# Altium PCB RPL_3V.PcbDoc
Units mil, origin at the board's own origin, x right, y up, seen from the top; angles counter-clockwise.
Board outline 1750.01 x 1712.1 mil, 2 copper layers (Top Layer, Bottom Layer); 10 components, 7 nets, 26 pads, 45 vias.
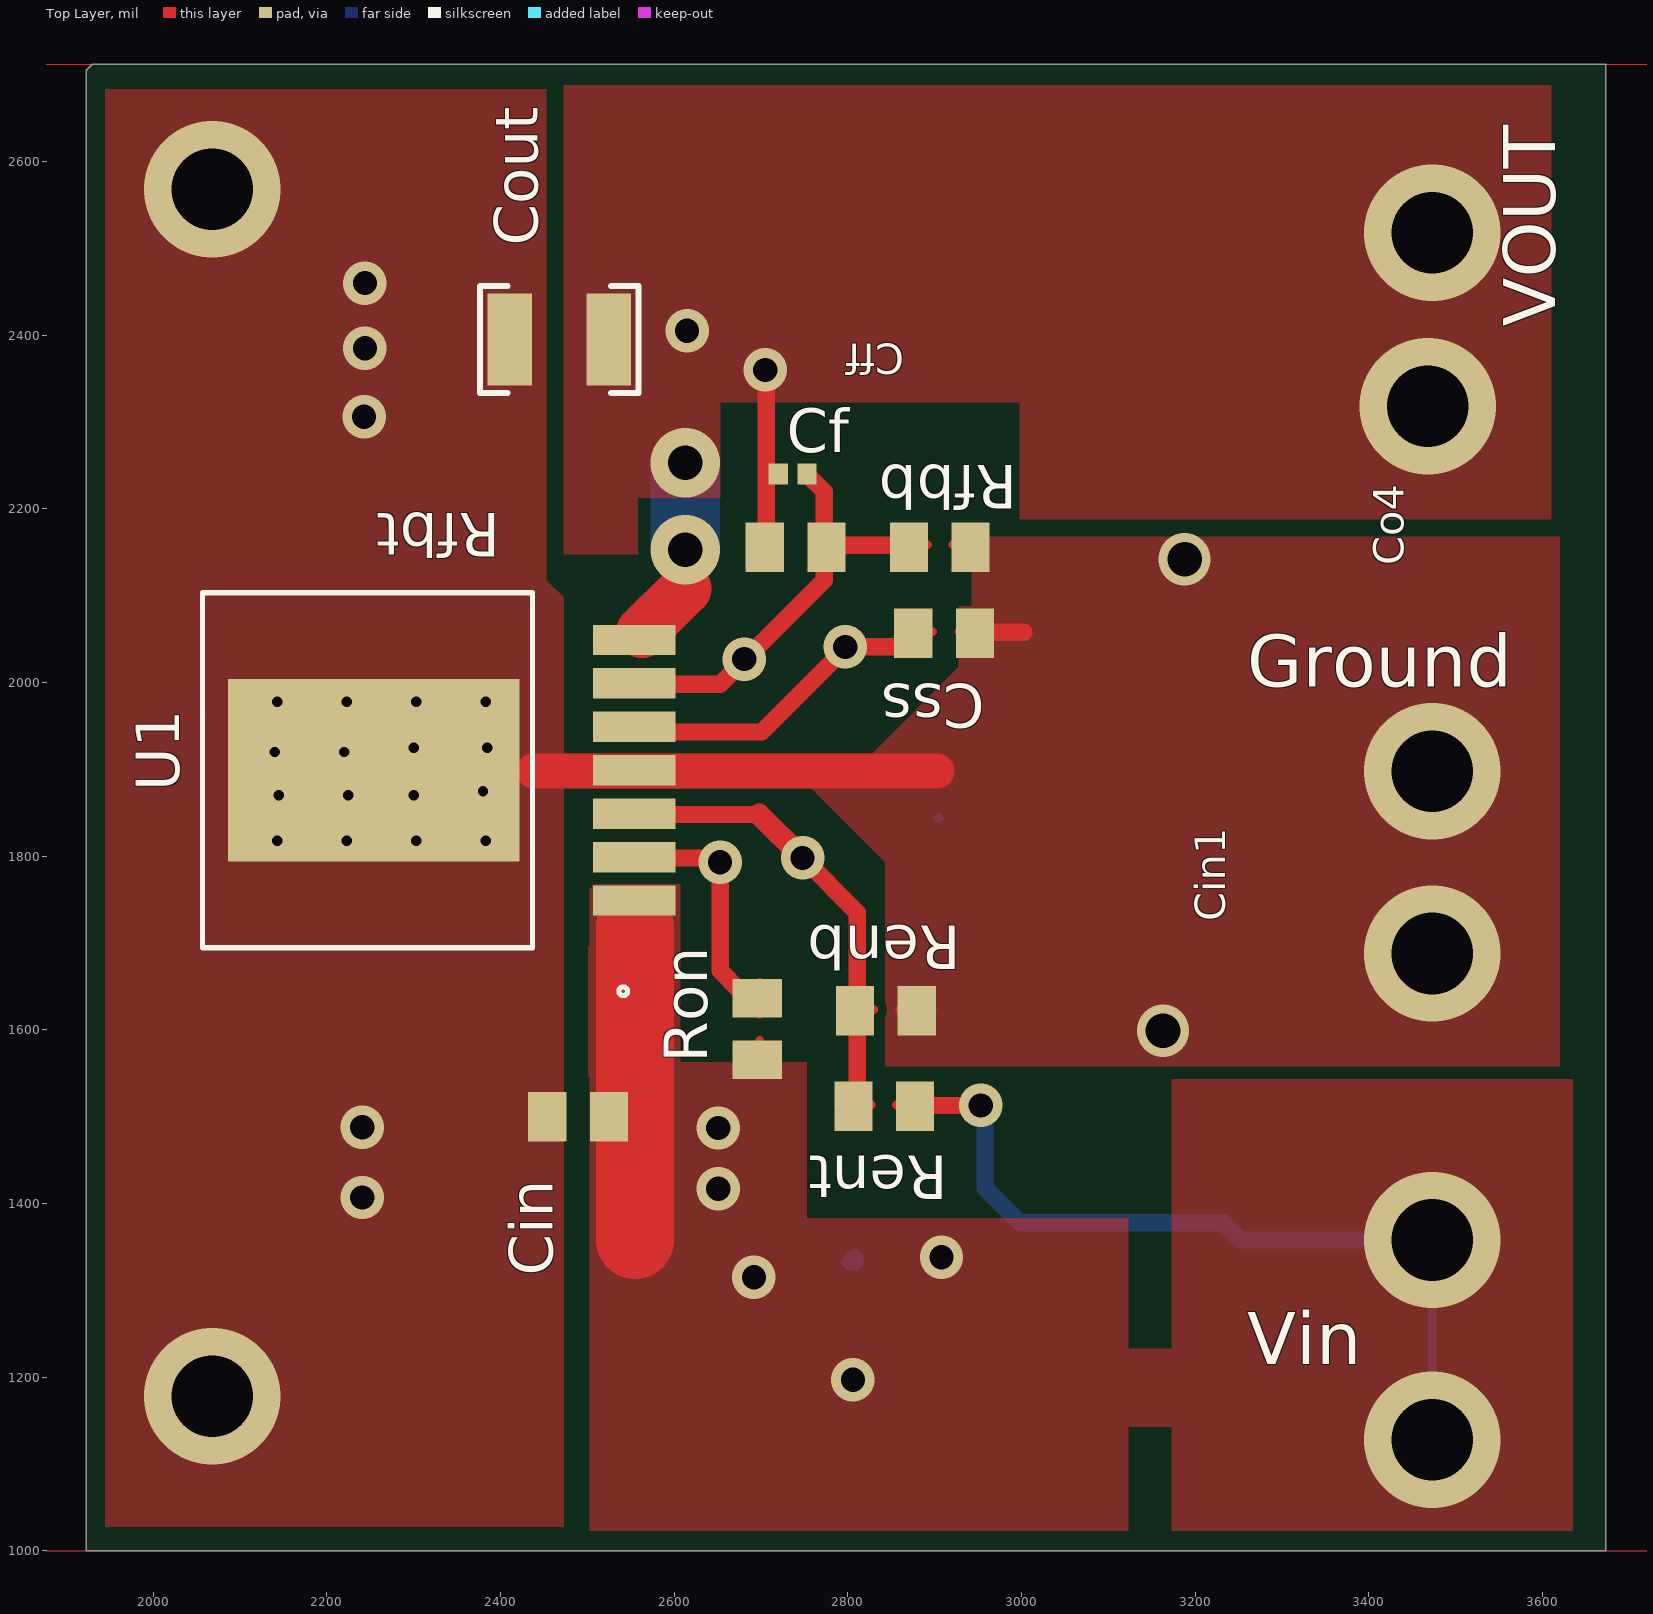
[diagram p0: Top Layer view]
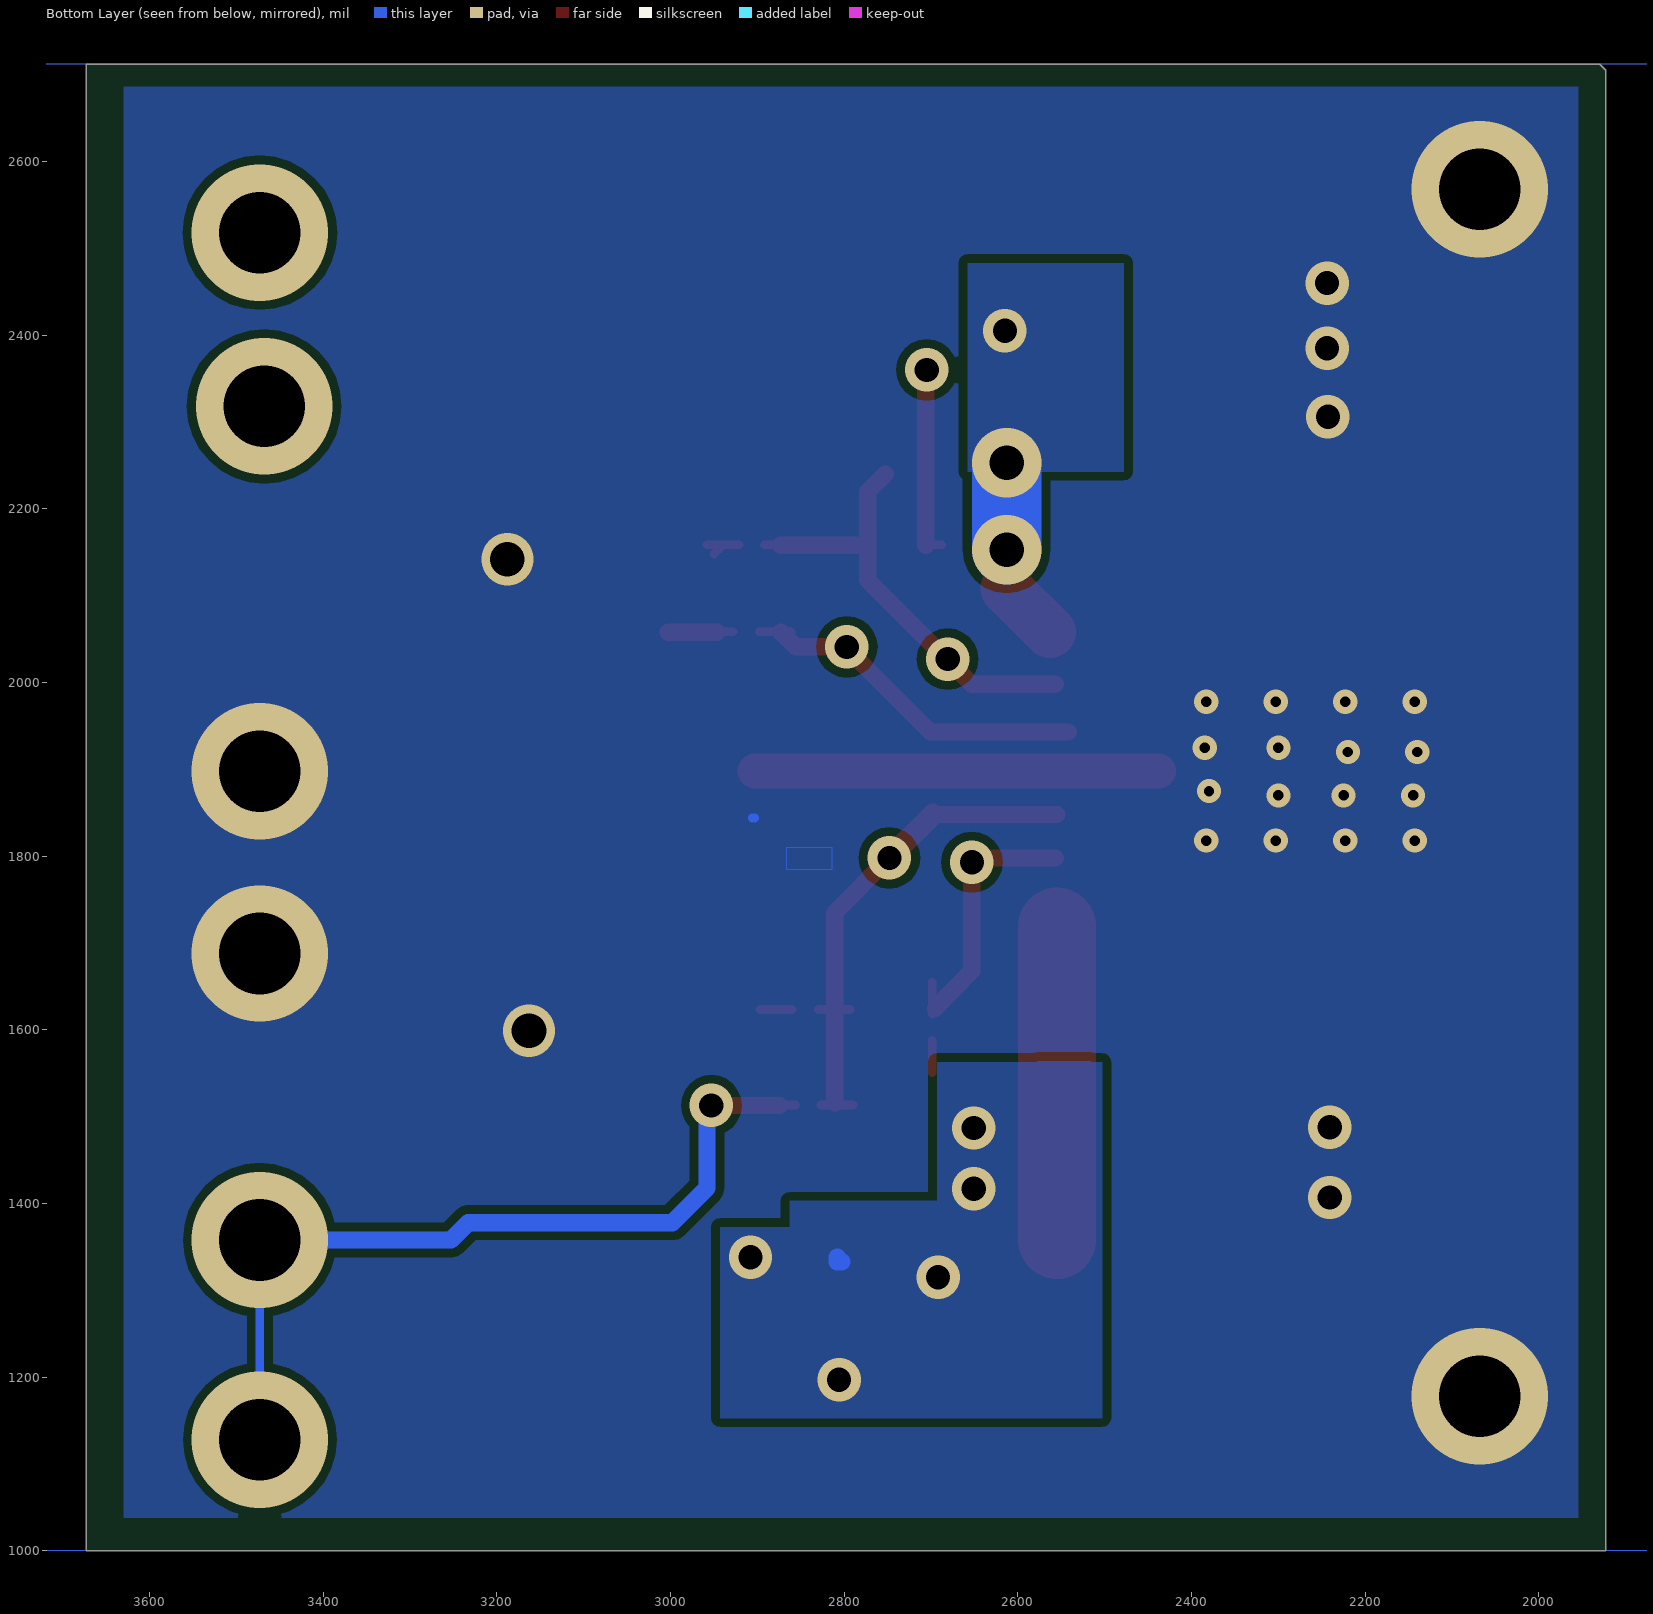
[diagram p1: Bottom Layer view, seen from below]

## Layer stack, top to bottom
Top Solder: solder mask 0.4, Solder Resist, Dk 3.5
Top Layer: signal copper 1.4
Dielectric2: prepreg 12.6, FR-4, Dk 4.8
Bottom Layer: signal copper 1.4
Bottom Solder: solder mask 0.4, Solder Resist, Dk 3.5

## Board outline
1929.92,2712.1 1922.99,2705.17 1922.99,1000 3673,1000 3673,2712.1

## Design rules (kind name [scope] priority, off if disabled: settings)
Clearance [All] p1: gap=10 ignorepadtopadclearanceinfootprint=FALSE except(0: Arc-Hole Track-Hole SMDPad-Hole THPad-Hole Via-Hole Fill-Hole Poly-Hole Region-Hole Text-Hole)
MinimumSolderMaskSliver [All] p1: minsoldermaskwidth=3
PlaneConnect [All] p1: planeconnectstyle=Direct reliefexpansion=20 reliefentries=4 reliefconductorwidth=10 reliefairgap=10
PolygonConnect [All] p1: connectstyle=Direct reliefconductorwidth=10 reliefentries=4 polygonreliefangle="90 Angle" airgapwidth=10
RoutingVias [All] p1: holewidth=28 width=50 viastyle="Through Hole" minholewidth=28 minwidth=50 maxholewidth=28 maxwidth=50
SolderMaskExpansion [All] p1: expansion=4
Width [All] p1: maxlimit=100 minlimit=10 preferedwidth=10
28 further rules are at their usual default settings.

## Components (designator, comment, footprint, x,y, rotation, side; value= is the part's Value field where it differs from the comment)
Cf "Comment" 0402 2736.5,2240 r0 top
Cin "Comment" 0805 2489.5,1500 r180 top
Cout "Comment" 1210_270 2467.91,2395 r180 top
Css "Comment" 0805 2911,2057 r0 top
Renb "Comment" 0805 2844,1622 r0 top
Rent "Comment" 0805 2842,1512 r180 top
Rfbb "Comment" 0805 2906,2156 r0 top
Rfbt "Comment" 0805 2740,2156 r0 top
Ron "Comment" 0805 2696,1601 r90 top
U1 "Comment" TZA07A 2344,1899 r90 top

## Footprints (in the part's own frame and the unit in brackets; to place one, negate y for a bottom-side part, rotate by r counter-clockwise, add the part's x,y. Pads: shape width x height; smd on the part's side, far side on the other; paste and mask are expansions set on the pad)
0402 [mil]
  rect 22x24 smd: 1(-16.5,0) 2(16.5,0)
0805 [mil]
  rect 44x57 smd: 1(-35.5,0) 2(35.5,0)
1210_270 [mm]
  rect 1.3x2.7 smd: 1(-1.45,0) 2(1.45,0)
  silkscreen extent -2.32,-1.57 2.32,1.57
TZA07A [mil]
  rect 35x95 smd: 1(-150,-210.25) 2(-100,-210.25) 3(-50,-210.25) 4(0,-210.25) 5(50,-210.25) 6(100,-210.25) 7(150,-210.25)
  rect 210x336 smd: 8(0,89.75)
  silkscreen extent -259,-203 204,287

## Via types
v1: diameter 50/50 (per signal layer), hole 28, Top Layer to Bottom Layer, 17 vias
v2: diameter 28/28 (per signal layer), hole 12, Top Layer to Bottom Layer, 16 vias
v3: diameter 157/157 (per signal layer), hole 94, Top Layer to Bottom Layer, 8 vias
v4: diameter 60/60 (per signal layer), hole 40, Top Layer to Bottom Layer, 2 vias
v5: diameter 80/80 (per signal layer), hole 40, Top Layer to Bottom Layer, 2 vias

## Nets (pads, with @x,y where several pads share a name; then routed paths per layer and width w, separated by ;. In a path a pad name is that pad's centre, name@x,y a point inside that pad or via, vN(x,y) a via of type N, cw(c..) or ccw(c..) an arc to the next point about the centre after c; other vN are vias at no path point)
0: Cin.2 Cout.2 Css.2 Renb.2 Rfbb.2 U1.4 U1.8 | length 649.1
  Top Layer w10: Renb.2@2860,1623.5 Renb.2@2897,1623.5 ; Rfbb.2@2921,2158.5 Rfbb.2@2958,2158.5 ; Css.2@2928,2058.5 Css.2@2965,2058.5 ; Rfbb.2@2940,2158 Rfbb.2@2950,2148
  Top Layer w20: Css.2@2947,2058 3003,2058
  Top Layer w40: 2438,1898 2903,1898
  Bottom Layer w10: 2903,1844 2906,1844
  other v1: 2241,1407 2241,1488 2243,2306 2244,2385 2244,2460
  other v2: 2143,1818 2223,1818 2303,1818 2383,1818 2145,1870 2225,1870 2300,1870 2380,1875 2140,1920 2220,1920 2300,1925 2385,1925 2143,1978 2223,1978 2303,1978 2383,1978
  other v3: 2068,1178 3473,1688 3473,1898 2068,2568
  other v4: 3163,1599 3188,2142
1: Renb.1 Rent.2 U1.3 | length 605.8
  Top Layer w10: Rent.2@2790,1513.5 Rent.2@2827,1513.5 ; Renb.1@2793,1623.5 Renb.1@2830,1623.5
  Top Layer w20: U1.3@2555,1848 2557,1848 2698,1848 2688,1848 ; v1(2748,1798) 2811,1735 2811,1623 Rent.2@2811,1516
  Top Layer w25: 2698,1848 v1(2748,1798)
2: Cin.1 Rent.1 Ron.1 U1.1 | length 1411.1
  Top Layer w10: Ron.1@2698.5,1551 2698.5,1588 ; Rent.1@2856,1513.5 Rent.1@2893,1513.5
  Top Layer w20: Rent.1@2875,1513 v1(2953,1513)
  Top Layer w90: 2555,1358 2555,1615 2555,1719
  Bottom Layer w10: v3(3473,1128) v3(3473,1358)
  Bottom Layer w20: 2803,1333 2808,1333 2808,1338 ; v1(2953,1513) 2958,1508 2958,1418 2998,1378 3233,1378 3253,1358 v3(3473,1358) ; v3@3458,1103 v3@3473,1118
  other v1: 2806,1197 2692,1315 2908,1338 2651,1417 2651,1487
3: Cf.1 Cout.1 Rfbt.1 U1.7 | length 402
  Top Layer w10: U1.7@2563,2048 U1.7@2563,2058 ; 2613,2108 v5@2613,2118 ; Rfbt.1@2688,2158.5 Rfbt.1@2706,2158.5 ; v1@2698,2348 v1@2706,2340
  Top Layer w20: Rfbt.1@2706,2158 2706,2158.5 v1@2706,2340
  Top Layer w60: U1.7@2563,2058 2613,2108
  Bottom Layer w80: v5(2613,2153) v5(2613,2253)
  other v1: 2705,2360 2615,2405
  other v3: 3468,2318 3473,2518
4: Cf.2 Rfbb.1 Rfbt.2 U1.6 | length 552
  Top Layer w10: Rfbt.2@2773,2158.5 Rfbt.2@2792,2158.5 ; Rfbb.1@2855,2158.5 Rfbb.1@2892,2158.5
  Top Layer w20: U1.6@2557,1998 2653,1998 2773,2118 Rfbt.2@2773,2158 ; Cf.2 2773,2220 2773,2158.5 Rfbt.2@2773,2158 ; Rfbb.1@2873,2158 Rfbt.2@2773,2158
  other v1: 2681,2027
5: Css.1 U1.5 | length 423.3
  Top Layer w10: U1.5@2557,1948 U1.5@2562,1943 ; Css.1@2861,2058.5 2898,2058.5
  Top Layer w20: U1.5@2542,1943 2701,1943 v1@2798,2040 ; v1(2797,2041) 2856,2041 Css.1@2873,2058
6: Ron.2 U1.2 | length 313.1
  Top Layer w10: Ron.2@2698.5,1618 Ron.2@2698.5,1655
  Top Layer w20: U1.2@2557,1798 v1@2648,1798 ; v1(2653,1793) 2653,1668 Ron.2@2695,1625

## Polygon pours and split planes (outlines as drawn)
3 on Top Layer "Top Layer-No Net" (solid, pour order 21): 2473,2148 2558,2148 2558,2213 2653,2213 2653,2323 2998,2323 2998,2188 3610,2188 3610,2688 2473,2688
2 on Top Layer "Top Layer-No Net" (solid, pour order 20): 2503,1023 2503,1763 2603,1763 2603,1563 2753,1563 2753,1383 3123,1383 3123,1233 3173,1233 3173,1543 3635,1543 3635,1023 3173,1023 3173,1143 3123,1143 3123,1023
2 on Top Layer "Top Layer-No Net" (solid, pour order 0): 2506,1768 2607,1768 2607,1545 2606,1546 2501,1546 2501,1696 2506,1696
0 on Top Layer "Top Layer-No Net" (solid, pour order 22): 2438,1740 2438,2008 2473,2008 2473,1740
0 on Top Layer "Top Layer-No Net" (solid, pour order 32): 1945,1028 1945,2683 2453,2683 2453,2118 2473,2098 2473,1918 2828,1918 2928,2018 2928,2088 2943,2088 2943,2168 3620,2168 3620,1558 2843,1558 2843,1793 2758,1878 2473,1878 2473,1028
0 on Bottom Layer "Top Layer-No Net" (solid, pour order 31): 1955,2686 1955,1038 3630,1038 3630,1872 3630,2686
2 on Bottom Layer "Top Layer-No Net" (solid, pour order 7): 2516,1356 2516,1564 2578,1564 2578,1356
1 on Bottom Layer "Top Layer-No Net" (solid, pour order 17): 2814,1785 2814,1810 2867,1810 2867,1785
2 on Bottom Layer "Top Layer-No Net" (solid, pour order 18): 2503,1153 2503,1563 2693,1563 2693,1403 2863,1403 2863,1373 2943,1373 2943,1153
3 on Bottom Layer "Top Layer-No Net" (solid, pour order 19): 2478,2483 2478,2243 2658,2243 2658,2483

## Other copper
Multi-Layer:
  lines w1: 1000,1000 1000,2712.1 4037.1,2712.1 4037.1,1000 1000,1000

## Silkscreen, mask and mechanical layers (free items; w line width, h text height)
Top Overlay:
  text "VOUT" at 3615,2410 h60 r90
  text "Cff" at 2865,2390 h35 r180
  text "Co4" at 3440,2135 h35 r90
  text "Ground" at 3260,1995 h60
  text "Cin1" at 3235,1725 h35 r90
  text "Vin" at 3260,1215 h60